# Altium PCB LED_PCB.PcbDoc (part 4 of 4)
Units mil, origin at the board's own origin, x right, y up, seen from the top; angles counter-clockwise.
Board outline 8000 x 4000 mil, 2 copper layers (Top Layer, Bottom Layer); 187 components, 303 nets, 1415 pads, 387 vias.
Unrouted connection lines stored in the file: 1.
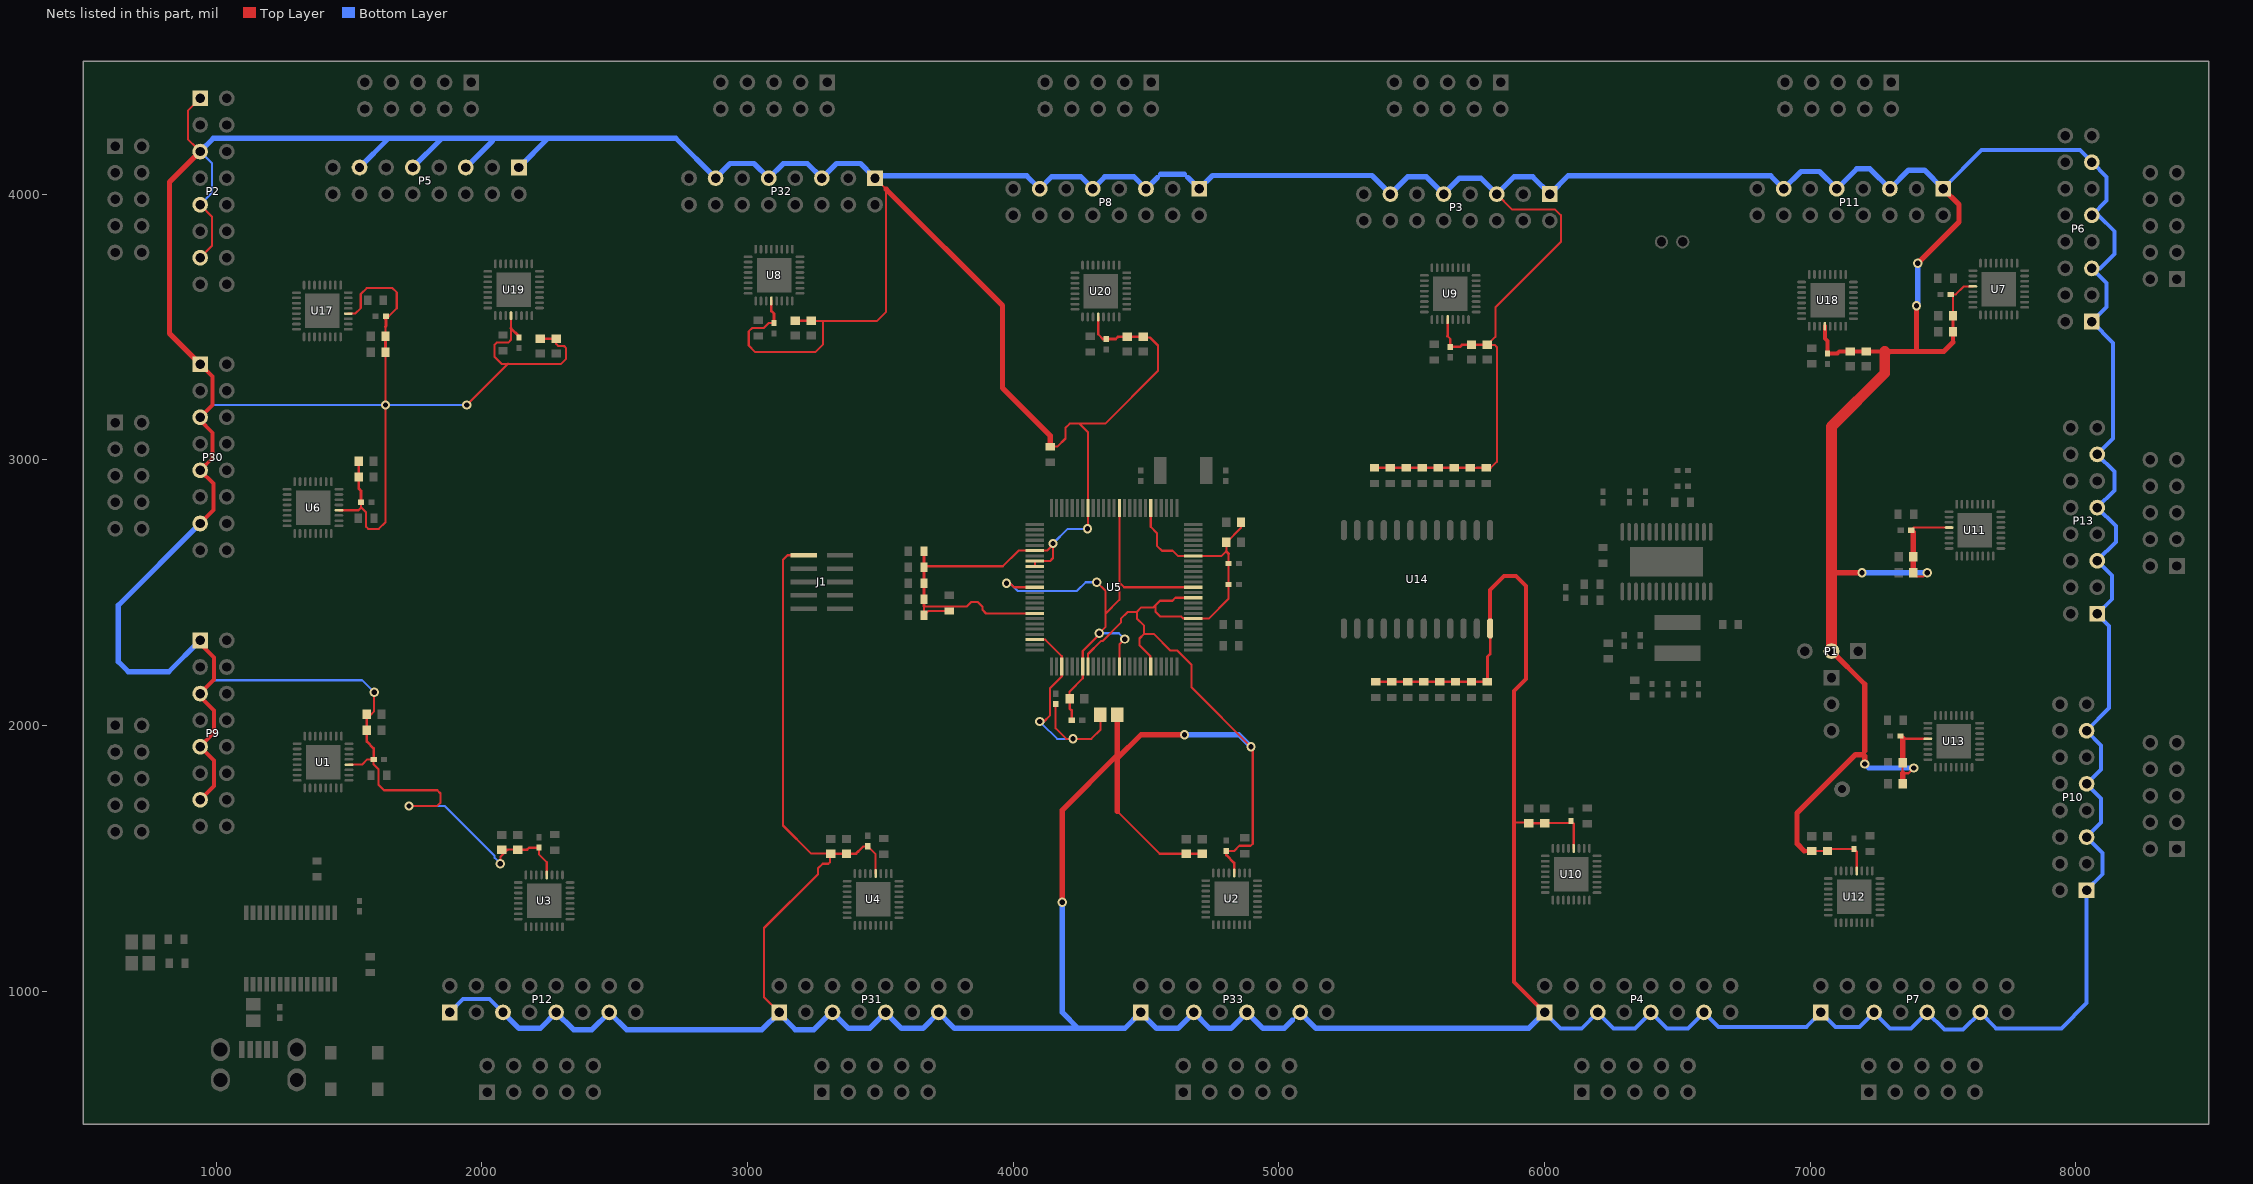
[diagram p4: the nets of this part, all layers, seen from the top]

## Via types
v1: diameter 35, hole 20, Top Layer to Bottom Layer, 371 vias
v2: diameter 25.98, hole 12.99, Top Layer to Bottom Layer, tented top, 12 vias
v3: diameter 89, hole 89, Top Layer to Bottom Layer, 4 vias

## Nets (pads, with @x,y where several pads share a name; then routed paths per layer and width w, separated by ;. In a path a pad name is that pad's centre, name@x,y a point inside that pad or via, vN(x,y) a via of type N, cw(c..) or ccw(c..) an arc to the next point about the centre after c; other vN are vias at no path point) (continued)
VCC: C1.2 C2.2 C3.2 C4.2 C5.2 C6.2 C7.2 C8.2 C9.2 C10.2 C11.2 C12.2 C13.2 C14.2 C15.2 C16.2 C22.2 C23.2 C24.2 C25.2 C26.2 C27.2 C28.2 C29.2 C30.2 C31.2 C32.2 C33.2 C34.2 C35.2 C36.2 C37.2 C38.2 C39.2 C40.2 C41.2 C42.2 C43.2 C44.2 C45.2 C60.2 C61.2 C62.2 C63.2 C64.2 C65.2 C66.2 C67.2 C68.2 C69.2 C70.2 C71.2 J1.1 L1.2 P1.2 P2.1 P2.5 P2.9 P2.13 P3.1 P3.5 P3.9 P3.13 P4.1 P4.5 P4.9 P4.13 P5.1 P5.5 P5.9 P5.13 P6.1 P6.5 P6.9 P6.13 P7.1 P7.5 P7.9 P7.13 P8.1 P8.5 P8.9 P8.13 P9.1 P9.5 P9.9 P9.13 P10.1 P10.5 P10.9 P10.13 P11.1 P11.5 P11.9 P11.13 P12.1 P12.5 P12.9 P12.13 P13.1 P13.5 P13.9 P13.13 P30.1 P30.5 P30.9 P30.13 P31.1 P31.5 P31.9 P31.13 P32.1 P32.5 P32.9 P32.13 P33.1 P33.5 P33.9 P33.13 R5.2 R6.2 R7.2 R8.2 R9.2 R12.2 R21.2 R22.2 R23.2 R24.2 R25.2 R26.2 R27.2 R28.2 R29.2 R30.2 R31.2 R32.2 R33.2 R34.1 R35.2 R36.2 R37.2 U1.28 U2.28 U3.28 U4.28 U5.8 U5.20 U5.32 U5.36 U5.44 U5.56 U5.68 U5.81 U5.83 U5.84 U5.93 U6.28 U7.28 U8.28 U9.28 U10.28 U11.28 U12.28 U13.28 U14.24 U17.28 U18.28 U19.28 U20.28 | length 53581.8
  Top Layer w8: P30.5@940,3160 986,3206 ; P2.13@940,3760 984.27,3804.27 984.27,3915.73 P2.9@940,3960 ; P2.5@940,4160 925,4175 894,4206 894,4314 P2.1@940,4360 ; U6.28@1462.44,2810.16 1536,2810.16 1545.31,2819.47 1545.31,2821 ; U17.28@1497.44,3550.16 1524.16,3550.16 1544.69,3570.69 1544.69,3624 1566.69,3646 1664,3646 1680,3630 1680,3570.37 1649.63,3540 1639.69,3530.06 1637.56,3527.93 1637.56,3501 C61.2@1637.56,3465 ; U1.28@1500.2,1852.4 1549.16,1852.4 1569,1872.24 C4.2@1593.07,1872.24 1593.07,1853 1612,1834.07 1612,1776 1631.86,1756.14 1832.36,1756.14 1844.5,1744 1844.5,1709.64 1832,1697.14 v1(1726,1697.14) ; C25.2@1545.31,2840 1545.31,2821 ; C3.2@1567.64,2042.24 1584,2042.24 1595,2053.24 v1(1595,2125) ; C62.2@1637.56,3405 v1@1637.56,3206.44 ; v1(1638,3206) v1@1637.56,3206.44 ; v1(1943,3206) 2097,3360 ; v1(2070,1480) 2070,1505 2097.44,1532.44 C5.2@2135,1532.44 ; 2098.5,3361.5 2097,3360 ; U19.28@2110.16,3542.56 2110.16,3494.64 2110.16,3451.22 2099.94,3441 2056,3441 2048,3433 2048,3388.25 2076.25,3360 2097,3360 ; C7.2@2215,1540.31 2215,1515 2244.84,1485.16 U3.28@2244.84,1437.44 ; C64.2@2280,3455.12 2280,3436 2288,3428 2309.72,3428 2317.72,3420 2317.72,3380.25 2297.47,3360 2097,3360 ; C28.2@3100,3514.69 3079.69,3514.69 3061,3496 3018,3496 3005,3483 3005,3430 3030,3405 3255,3405 3285,3435 3285,3522.56 ; P31.1@3120,920 3062.47,977.53 3062.47,1237.47 3265.5,1440.5 3265.5,1462.22 3282.78,1479.5 3304.5,1479.5 3310,1485 C11.2@3310,1517.44 ; J1.1@3211.89,2640.79 3150.79,2640.79 3134,2624 3134,1623.44 3240,1517.44 C11.2@3312.76,1517.44 ; C27.2@3240,3522.56 3285,3522.56 ; 3416.63,1525.31 3435,1543.68 3435,1545 C12.2@3452.76,1545 3482.6,1515.16 U4.28@3482.6,1442.44 ; P32.1@3480,4060 3522,4018 3522,3556.56 3488,3522.56 3285,3522.56 ; R8.2@3664.53,2471 R8.2@3664.53,2475 ; R6.2@3664.53,2595 3664.53,2599 3961.33,2599 4020.13,2657.8 U5.81@4081.77,2657.8 4127.2,2657.8 4150,2680.59 v1(4150,2685) 4150,2630 4138.43,2618.43 U5.83@4081.77,2618.43 U5.84@4081.77,2598.74 ; R34.1@3760,2430.47 3680,2430.47 R9.2@3664.53,2415 3664.53,2447.5 3825.78,2447.5 3842.78,2464.5 3867.22,2464.5 3884.5,2447.22 3884.5,2435 3897.93,2421.57 U5.93@4081.77,2421.57 ; R12.2@4130.47,3049.53 4166.53,3049.53 4197,3080 4197,3120 4213,3136 4249.57,3136 ; v1@4275,2740 v1(4280,2740) 4281.57,2741.57 U5.68@4281.57,2818.23 4281.57,3104 4249.57,3136 ; U5.8@4281.57,2221.77 4281.57,2269 4330,2317.43 4336.15,2317.43 4405.5,2386.78 4405.5,2401.53 4431.19,2427.22 4465.5,2427.22 ; U20.28@4320.16,3537.56 4320.16,3472 4337.47,3454.69 4337.69,3454.69 C71.2@4350,3454.69 ; 4391.5,1677 4551.25,1517.24 C9.2@4652.24,1517.24 ; C70.2@4490,3462.56 4492.56,3460 4515,3460 4545,3430 4545,3335 4346,3136 4249.57,3136 ; U5.20@4517.8,2221.77 4516.02,2223.55 4516.02,2261.19 4475.5,2301.71 4475.5,2327.22 4492.78,2344.5 ; U5.56@4517.8,2818.23 4517.8,2747.5 4540.8,2724.5 4540.8,2676.7 4560,2657.5 4600.38,2657.5 4619.77,2638.11 U5.44@4678.23,2638.11 4784.55,2638.11 4802.44,2656 ; U5.36@4678.23,2480.63 4610.63,2480.63 4599.5,2469.5 4552.78,2469.5 4535.5,2452.22 ; C1.2@4802.24,1527.56 4832,1527.56 4851.44,1547 4894,1547 4901.96,1554.96 v1@4901.96,1912.79 ; U2.28@4832.09,1444.68 4832.09,1482.36 ; C15.2@4857.56,2765 4857.56,2744 4803.56,2690 C16.2@4802.44,2690 4802.44,2656 ; v1@4894.72,1920.04 v1@4901.96,1912.79 ; 5635.16,3464.84 5645,3455 C33.2@5645,3424.69 ; R25.2@5720,2969.53 5746,2969.53 ; R28.2@5780,2969.53 5798.03,2969.53 5820.5,2992 5820.5,3424.5 5812.44,3432.56 C31.2@5785,3432.56 5815,3462.56 5815,3573 6061.53,3819.53 6061.53,3920 6040,3941.53 5878.47,3941.53 P3.5@5820,4000 ; 5887,1635 5885,1635 5947.44,1635 C35.2@5950,1632.44 ; C36.2@6000,1632.44 6092.13,1632.44 C37.2@6100,1640.31 6109.84,1630.47 U10.28@6109.84,1537.44 ; C38.2@7005,1527.44 C39.2@7065,1527.44 7072.87,1535.31 C40.2@7165,1535.31 7174.84,1525.47 U12.28@7174.84,1452.44 ; 7080,2580 7085,2575 ; 7103,3399.69 7110.87,3407.56 7103.6,3407.56 ; C43.2@7347.56,1860 7347.56,1820 7370,1820 v1(7390,1840) ; C45.2@7347.56,1952.13 C45.2@7339.69,1960 7349.84,1949.84 U13.28@7442.56,1949.84 ; C41.2@7387.56,2575 7402.56,2560 7425,2560 v1(7440,2575) ; C34.2@7387.56,2727.13 C34.2@7379.69,2735 7389.53,2744.84 U11.28@7522.56,2744.84 ; C22.2@7525,3622.44 C22.2@7529.21,3622.44 ; C29.2@7537.09,3542.44 7537.09,3614.57 C22.2@7529.21,3622.44 ; U7.28@7612.09,3652.28 7577.28,3652.28 7547.44,3622.44 C22.2@7529.21,3622.44 ; 1545.31,2821 1564.25,2802.06 1564.25,2748.24 1572.49,2740 1613,2740 1637.56,2764.56 v1@1637.56,3206.44 ; 4465.5,2427.22 4482.78,2444.5 4527.78,2444.5 4535.5,2452.22 ; 4465.5,2427.22 4465.5,2402.78 4492.78,2375.5 4492.78,2344.5 ; 4492.78,2344.5 4529.28,2344.5 4591.88,2281.9 4617.1,2281.9 4671.65,2227.35 4671.65,2143.1 v1@4901.96,1912.79 ; 4535.5,2452.22 4535.5,2427.78 4552.78,2410.5 4631.98,2410.5 4638.81,2403.67 4676.45,2403.67 U5.32@4678.23,2401.89 4736,2401.89 4810.31,2476.2 C13.2@4810.31,2530 C14.2@4810.31,2610 4810.31,2646 4810.31,2648.13 4802.44,2656
  Top Layer w10: P2.5@925,4175 P2.5@940,4175 ; P9.5@940,2109.06 P9.5@940,2120 ; P9.1@940,2309.06 P9.1@940,2320 ; P30.5@940,3149.06 P30.5@940,3160 ; P2.5@940,4155 P2.5@940,4160 ; C24.2@1537.44,2995 C23.2@1537.44,2935 1537.44,2890.87 1545.31,2883 C25.2@1545.31,2840 ; C3.2@1567.64,2042.24 C2.2@1567.64,1982.24 1567.64,1939.43 1593.07,1914 C4.2@1593.07,1872.24 ; C62.2@1637.56,3405 C61.2@1637.56,3465 ; 1637.56,3501 1639.69,3503.13 1639.69,3530.06 C63.2@1639.69,3540 ; 1637.56,3527.93 C63.2@1639.69,3540 ; C63.2@1649.63,3540 C63.2@1639.69,3540 ; C6.2@2075,1532.44 2097.44,1532.44 ; 2110.16,3494.64 2140,3464.8 C66.2@2140,3459.69 ; C5.2@2135,1532.44 2171,1532.44 2178.87,1540.31 C7.2@2215,1540.31 ; P5.1@2140,4100 P5.1@2140,4120 ; C65.2@2220,3455.12 C64.2@2280,3455.12 ; P32.13@2880,4049.06 P32.13@2880,4060 ; U8.28@3090.16,3597.56 3090.16,3559.84 3100,3550 C28.2@3100,3514.69 ; C26.2@3180,3522.56 C27.2@3240,3522.56 ; C11.2@3312.76,1517.44 C10.2@3372.76,1517.44 3408.76,1517.44 3416.63,1525.31 ; 3664.53,2447.5 R8.2@3664.53,2471 ; R8.2@3664.53,2475 R7.2@3664.53,2535 R6.2@3664.53,2595 ; R6.2@3664.53,2599 R5.2@3664.53,2655 ; 4337.69,3454.69 4338,3455 4350,3455 C71.2@4350,3454.69 4386,3454.69 4393.87,3462.56 C69.2@4430,3462.56 C70.2@4490,3462.56 ; C9.2@4652.24,1517.24 C8.2@4712.24,1517.24 ; C1.2@4802.24,1527.56 4802.24,1512.2 4832.09,1482.36 ; 4802.44,2656 4802.44,2653.87 4810.31,2646 ; R27.2@5360,2969.53 R30.2@5420,2969.53 R35.2@5480,2969.53 R37.2@5540,2969.53 R21.2@5600,2969.53 R23.2@5660,2969.53 R25.2@5720,2969.53 ; R33.2@5365,2164.53 R29.2@5425,2164.53 R26.2@5485,2164.53 R24.2@5545,2164.53 R22.2@5605,2164.53 R36.2@5665,2164.53 R32.2@5725,2164.53 R31.2@5785,2164.53 5785,2259 5795,2269 U14.24@5795,2364.96 ; 5635,3465 5635.16,3464.84 ; 5635.16,3465.16 U9.28@5635.16,3527.56 ; C33.2@5645,3424.69 5681,3424.69 5688.87,3432.56 C32.2@5725,3432.56 C31.2@5785,3432.56 ; 5746,2969.53 R28.2@5780,2969.53 ; C35.2@5940,1632.44 C36.2@6000,1632.44 ; C30.2@7537.09,3482.44 C29.2@7537.09,3542.44 ; P7.13@7640,920 P7.13@7650,920
  Top Layer w15: P9.13@940,1720 992.47,1772.47 992.47,1867.53 P9.9@940,1920 992.47,1972.47 992.47,2056.58 P9.5@940,2109.06 ; P9.5@940,2120 992.47,2172.47 992.47,2256.58 P9.1@940,2309.06 ; P30.5@940,3149.06 987.53,3101.53 987.53,3007.53 P30.9@940,2960 990,2910 990,2810 P30.13@950.94,2770.94 ; P30.1@940,3360 986,3314 986,3206 ; P30.5@950.94,3170.94 984.53,3204.53 ; U14.24@5795,2364.96 5795,2510 5847,2562 5893,2562 5930,2525 5930,2175 5885,2130 5885,1635 5885,1035 P4.1@6000,920 ; 6977.56,1527.44 C38.2@7005,1527.44 ; U18.28@7055.16,3502.56 7055.16,3456 7065,3446.16 C60.2@7065,3399.69 7103,3399.69 ; 7110.87,3407.56 C68.2@7150,3407.56 C67.2@7210,3407.56 7280,3407.56 ; 7537.09,3442.09 C30.2@7537.09,3482.44
  Top Layer w20: P30.13@940,2770.94 P30.13@950.94,2770.94 ; P30.5@940,3170.94 P30.5@950.94,3170.94 ; P30.1@940,3360 825,3475 825,4045 P2.5@940,4160 ; 3522,4018 3960,3580 3960,3270 4140,3090 R12.2@4140,3049.53 ; v1(4185,1335) 4185,1681.5 4391.5,1888 ; 4391.5,1677 4391.5,1875 ; L1.2@4391.5,2040 4391.5,1888 ; v1(4645,1965) 4481.5,1965 4391.5,1875 ; 6977.56,1527.44 6950,1555 6950,1670 7170.3,1890.3 7199.5,1890.3 7205,1884.8 v1(7205,1855) ; P1.2@7080,2280 7205,2155 7205,1905 ; 7085,2575 v1(7195,2575) ; 7282.37,3405 7295.63,3405 ; 7298.19,3407.56 7400,3407.56 ; C44.2@7347.56,1780 7347.56,1820 ; C43.2@7347.56,1860 C45.2@7347.56,1952.13 ; C41.2@7387.56,2575 C42.2@7387.56,2635 C34.2@7387.56,2727.13 ; v1@7400,3570 7400,3407.56 ; v1(7405,3740) 7560,3895 7560,3960 P11.1@7500,4020 ; 7537.09,3442.09 7502.56,3407.56 7400,3407.56 ; 4391.5,1875 4391.5,1888
  Top Layer w40: P1.2@7080,2280 7080,3125 7280,3325 7280,3407.56
  Bottom Layer w8: P9.5@940,2120 990,2170 1550,2170 v1(1595,2125) ; P30.5@940,3160 986,3206 v1(1638,3206) v1(1943,3206) ; P2.9@940,3960 984.53,4004.53 984.53,4115.47 P2.5@940,4160 ; v1(1726,1697.14) 1859.86,1697.14 2048.5,1508.5 2048.5,1501.5 v1(2070,1480) ; 2250,4210 2255,4210 ; P31.1@3120,915 P31.1@3120,920 ; P31.5@3315,920 P31.5@3320,920 ; v1(4150,2685) 4205,2740 v1(4280,2740) ; 4542.53,4062.53 4555,4075 ; 4645,4075 4657.47,4062.53 ; 5050,890 P33.13@5080,920 ; v1(7205,1855) 7220,1840 ; v1(7400,3580) v1@7405,3585 ; P6.5@8060,3720 8090,3720 ; P6.9@8060,3920 P6.9@8085,3920
  Bottom Layer w15: P12.1@1880,920 1930,970 2030,970 P12.5@2080,920 ; P4.1@6000,920 6060,860 6140,860 P4.5@6200,920 6260,860 6340,860 P4.9@6400,920 6460,860 6540,860 P4.13@6600,920 6655,865 6985,865 P7.1@7040,920 7095,865 7185,865 P7.5@7240,920 7300,860 7380,860 P7.9@7440,920 7505,855 7575,855 P7.13@7640,920 7700,860 7945,860 8040,955 P10.1@8040,1380 8100,1440 8100,1520 P10.5@8040,1580 8095,1635 8095,1725 P10.9@8040,1780 8095,1835 8095,1925 P10.13@8040,1980 8125,2065 8125,2375 P13.1@8080,2420 8135,2475 8135,2565 P13.5@8080,2620 8150,2690 8150,2750 P13.9@8080,2820 8145,2885 8145,2955 P13.13@8080,3020 8140,3080 8140,3440 P6.1@8060,3520 8115,3575 8115,3665 P6.5@8060,3720 ; P11.1@7500,4020 7645,4165 8015,4165 P6.13@8060,4120 8115,4065 8115,3975 P6.9@8060,3920 ; P6.9@8085,3920 8145,3860 8145,3775 8090,3720
  Bottom Layer w20: P9.1@940,2320 822,2202 670,2202 632,2240 632,2452 P30.13@940,2760 ; P2.5@940,4160 990,4210 1650,4210 ; P5.13@1540,4100 1650,4210 ; P5.9@1740,4100 1850,4210 ; P5.5@1940,4100 2040,4200 ; P12.5@2080,920 2140,860 2220,860 P12.9@2280,920 2345,855 2415,855 P12.13@2480,920 2545,855 3055,855 P31.1@3120,920 ; P5.1@2140,4100 2250,4210 ; P31.1@3120,915 3180,855 3250,855 P31.5@3315,920 ; P31.5@3320,920 3380,860 3460,860 P31.9@3520,920 3580,860 3660,860 P31.13@3720,920 3780,860 4420,860 P33.1@4480,920 4540,860 4620,860 P33.5@4680,920 4740,860 4820,860 P33.9@4880,920 4940,860 5020,860 5050,890 ; v1(4185,1335) 4185,920 4245,860 ; 4542.53,4062.53 P8.5@4500,4020 4455,4065 4345,4065 P8.9@4300,4020 4255,4065 4145,4065 P8.13@4100,4020 4051,4069 3471,4069 3425,4115 3335,4115 P32.5@3280,4060 3225,4115 3135,4115 P32.9@3080,4060 3025,4115 2935,4115 P32.13@2880,4060 2730,4210 1850,4210 ; 4555,4075 4645,4075 ; v1(4645,1965) 4850,1965 v1(4895,1920) ; 4657.47,4062.53 P8.1@4700,4020 4750,4070 5350,4070 P3.13@5420,4000 5484.53,4064.53 5555.47,4064.53 P3.9@5620,4000 5680,4060 5760,4060 P3.5@5820,4000 5885,4065 5955,4065 P3.1@6020,4000 6089,4069 6851,4069 P11.13@6900,4020 6965,4085 7035,4085 P11.9@7100,4020 7175,4095 7225,4095 P11.5@7300,4020 7370,4090 7430,4090 P11.1@7500,4020 ; P33.13@5080,920 5140,860 5940,860 P4.1@6000,920 ; v1(7195,2575) v1(7440,2575) ; 7220,1840 v1(7390,1840) ; v1@7405,3585 v1(7405,3740) ; 1650,4210 1850,4210
VDD25: C20.2 C21.2 U5.7 U5.14 U5.38 U5.62 U5.88 | length 1999.7
  Top Layer w8: v1(3975,2535) 3988.19,2535 4003.19,2520 U5.88@4081.77,2520 ; C20.2@4212.44,2100 4212.44,2128 4261.89,2177.45 U5.7@4261.89,2221.77 4261.89,2280.26 v1@4328.63,2347 ; v1(4315,2539) 4348,2506 4348,2421.45 ; v1(4324,2347) 4348,2371 4348,2421.45 ; U5.14@4399.69,2221.77 4399.69,2304.69 v1(4420,2325) ; U5.62@4399.69,2818.23 4399.69,2538.31 ; U5.38@4678.23,2520 4418,2520 4399.69,2538.31 ; 4348,2421.45 4399.69,2473.14 4399.69,2538.31
  Top Layer w10: C20.2@4212.44,2100 4212.44,2063.87 4220.31,2056 C21.2@4220.31,2020
  Bottom Layer w8: v1(3975,2535) 3988.19,2535 4017.28,2505.91 4240,2505.91 4273.09,2539 v1(4315,2539) ; v1(4324,2347) 4398,2347 v1(4420,2325) v1@4424.19,2320.81
VDDA: C19.2 L1.1 U5.3 U5.98 | length 932.1
  Top Layer w8: U5.98@4081.77,2323.15 4121,2323.15 4183.15,2261 U5.3@4183.15,2221.77 4183.15,2184 4138,2138.85 4138,2037 4116,2015 v1(4100,2015) ; C19.2@4160,2080.31 4160,1988.84 4199.34,1949.5 v1(4225.5,1949.5) 4294.01,1949.5 4328.5,1984 L1.1@4328.5,2040
  Bottom Layer w8: v1(4100,2015) 4116,2015 4108,2007 4165.5,1949.5 v1(4225.5,1949.5)
pads on no net: D3.2 J1.7 P1.1 P34.2 P34.3 R17.2 R18.2 R19.2 R20.2 SW1.2 SW1.3 U1.2 U1.3 U1.4 U1.21 U1.22 U1.24 U1.25 U2.2 U2.3 U2.4 U2.21 U2.22 U2.24 U2.25 U3.2 U3.3 U3.4 U3.21 U3.22 U3.24 U3.25 U4.2 U4.3 U4.4 U4.21 U4.22 U4.24 U4.25 U5.1 U5.2 U5.5 U5.11 U5.13 U5.16 U5.17 U5.18 U5.35 U5.37 U5.40 U5.43 U5.46 U5.51 U5.52 U5.53 U5.55 U5.67 U5.71 U5.91 U6.2 U6.3 U6.4 U6.21 U6.22 U6.24 U6.25 U7.2 U7.3 U7.4 U7.9 U7.11 U7.12 U7.13 U7.14 U7.21 U7.22 U7.24 U7.25 U8.2 U8.3 U8.4 U8.21 U8.22 U8.24 U8.25 U9.2 U9.3 U9.4 U9.21 U9.22 U9.24 U9.25 U10.2 U10.3 U10.4 U10.21 U10.22 U10.23 U10.24 U10.25 U10.27 U11.2 U11.3 U11.4 U11.9 U11.11 U11.12 U11.13 U11.14 U11.21 U11.22 U11.23 U11.24 U11.25 U11.27 U12.2 U12.3 U12.4 U12.21 U12.22 U12.23 U12.24 U12.25 U12.27 U13.2 U13.3 U13.4 U13.21 U13.22 U13.23 U13.24 U13.25 U13.27 U15.1 U15.2 U15.3 U15.6 U15.8 U15.9 U15.10 U15.12 U15.13 U15.14 U15.24 U15.27 U15.28 U16.27 U17.2 U17.3 U17.4 U17.21 U17.22 U17.24 U17.25 U18.2 U18.3 U18.4 U18.21 U18.22 U18.24 U18.25 U19.2 U19.3 U19.4 U19.21 U19.22 U19.24 U19.25 U20.2 U20.3 U20.4 U20.21 U20.22 U20.24 U20.25
copper on no net: | length 613
  Top Layer w8: 6129.53,1537.44 6129.53,1574.53 6155,1600 6155,1604.69 ; 7349.53,2020 7354.31,2020 7359.31,2015 ; 7375.31,2015 7380,2010.31 7380,2010 7420.47,1969.53 7442.56,1969.53 ; 7415.31,2790 7440.78,2764.53 7522.56,2764.53 ; 7810,3675 7845,3675 ; 7815,3655 7850,3655 ; 7819,3634 7838.37,3634 ; 7820,3615 7843,3615
  Top Layer w10: 6155,1604.69 6160,1609.69 6160,1620 ; 7195,1460 7195,1490 7215,1510 7215,1520 ; 7354.53,2015 7375.31,2015 ; 7394.53,2790 7415.31,2790 ; 7730,2665 7746.17,2665 ; 7730,2705 7746.17,2705 ; 7730,2725 7746.17,2725 ; 7730,2745 7746.17,2745 ; 7730,2765 7745,2765
  other v1: 7117.76,1307.76 7165,1307.76 7212.24,1307.76 7117.76,1355 7165,1355 7212.24,1355 6052.76,1392.76 6100,1392.76 6147.24,1392.76 7117.76,1402.24 7165,1402.24 7212.24,1402.24 6052.76,1440 6100,1440 6147.24,1440 6052.76,1487.24 6100,1487.24 6147.24,1487.24 7492.76,1892.76 7540,1892.76 7587.24,1892.76 7492.76,1940 7540,1940 7587.24,1940 7492.76,1987.24 7540,1987.24 7587.24,1987.24 7572.76,2687.76 7620,2687.76 7667.24,2687.76 7572.76,2735 7620,2735 7667.24,2735 7572.76,2782.24 7620,2782.24 7667.24,2782.24
  other v3: 650,650 8350,650 650,4350 8350,4350

## Other copper
Multi-Layer:
  the board outline again, w10

## Text inside footprints (layer, text, board x,y; h text height)
P2: Top Overlay "2" at 1020,4460 h50 r270; Top Overlay "1" at 920,4460 h50 r270; Top Overlay "15" at 920,3600 h50 r270; Top Overlay "16" at 1020,3600 h50 r270
P3: Top Overlay "2" at 6120,3920 h50 r180; Top Overlay "1" at 6120,4020 h50 r180; Top Overlay "15" at 5260,4020 h50 r180; Top Overlay "16" at 5260,3920 h50 r180
P4: Top Overlay "2" at 5900,1000 h50; Top Overlay "1" at 5900,900 h50; Top Overlay "15" at 6760,900 h50; Top Overlay "16" at 6760,1000 h50
P5: Top Overlay "2" at 2240,4020 h50 r180; Top Overlay "1" at 2240,4120 h50 r180; Top Overlay "15" at 1380,4120 h50 r180; Top Overlay "16" at 1380,4020 h50 r180
P6: Top Overlay "2" at 7980,3420 h50 r90; Top Overlay "1" at 8080,3420 h50 r90; Top Overlay "15" at 8080,4280 h50 r90; Top Overlay "16" at 7980,4280 h50 r90
P7: Top Overlay "2" at 6940,1000 h50; Top Overlay "1" at 6940,900 h50; Top Overlay "15" at 7800,900 h50; Top Overlay "16" at 7800,1000 h50
P8: Top Overlay "2" at 4800,3940 h50 r180; Top Overlay "1" at 4800,4040 h50 r180; Top Overlay "15" at 3940,4040 h50 r180; Top Overlay "16" at 3940,3940 h50 r180
P9: Top Overlay "2" at 1020,2420 h50 r270; Top Overlay "1" at 920,2420 h50 r270; Top Overlay "15" at 920,1560 h50 r270; Top Overlay "16" at 1020,1560 h50 r270
P10: Top Overlay "2" at 7960,1280 h50 r90; Top Overlay "1" at 8060,1280 h50 r90; Top Overlay "15" at 8060,2140 h50 r90; Top Overlay "16" at 7960,2140 h50 r90
P11: Top Overlay "2" at 7600,3940 h50 r180; Top Overlay "1" at 7600,4040 h50 r180; Top Overlay "15" at 6740,4040 h50 r180; Top Overlay "16" at 6740,3940 h50 r180
P12: Top Overlay "2" at 1780,1000 h50; Top Overlay "1" at 1780,900 h50; Top Overlay "15" at 2640,900 h50; Top Overlay "16" at 2640,1000 h50
P13: Top Overlay "2" at 8000,2320 h50 r90; Top Overlay "1" at 8100,2320 h50 r90; Top Overlay "15" at 8100,3180 h50 r90; Top Overlay "16" at 8000,3180 h50 r90
P14: Top Overlay "6" at 700,3240 h50 r270; Top Overlay "10" at 700,2680 h50 r270; Top Overlay "5" at 600,2680 h50 r270; Top Overlay "1" at 600,3240 h50 r270
P15: Top Overlay "6" at 4540,700 h50; Top Overlay "10" at 5100,700 h50; Top Overlay "5" at 5100,600 h50; Top Overlay "1" at 4540,600 h50
P16: Top Overlay "6" at 3400,4340 h50 r180; Top Overlay "10" at 2840,4340 h50 r180; Top Overlay "5" at 2840,4440 h50 r180; Top Overlay "1" at 3400,4440 h50 r180
P17: Top Overlay "6" at 6040,700 h50; Top Overlay "10" at 6600,700 h50; Top Overlay "5" at 6600,600 h50; Top Overlay "1" at 6040,600 h50
P18: Top Overlay "6" at 5935,4340 h50 r180; Top Overlay "10" at 5375,4340 h50 r180; Top Overlay "5" at 5375,4440 h50 r180; Top Overlay "1" at 5935,4440 h50 r180
P19: Top Overlay "6" at 7120,700 h50; Top Overlay "10" at 7680,700 h50; Top Overlay "5" at 7680,600 h50; Top Overlay "1" at 7120,600 h50
P20: Top Overlay "6" at 700,4280 h50 r270; Top Overlay "10" at 700,3720 h50 r270; Top Overlay "5" at 600,3720 h50 r270; Top Overlay "1" at 600,4280 h50 r270
P21: Top Overlay "6" at 8300,3580 h50 r90; Top Overlay "10" at 8300,4140 h50 r90; Top Overlay "5" at 8400,4140 h50 r90; Top Overlay "1" at 8400,3580 h50 r90
P22: Top Overlay "6" at 8300,1435 h50 r90; Top Overlay "10" at 8300,1995 h50 r90; Top Overlay "5" at 8400,1995 h50 r90; Top Overlay "1" at 8400,1435 h50 r90
P23: Top Overlay "6" at 700,2100 h50 r270; Top Overlay "10" at 700,1540 h50 r270; Top Overlay "5" at 600,1540 h50 r270; Top Overlay "1" at 600,2100 h50 r270
P24: Top Overlay "6" at 2060,4340 h50 r180; Top Overlay "10" at 1500,4340 h50 r180; Top Overlay "5" at 1500,4440 h50 r180; Top Overlay "1" at 2060,4440 h50 r180
P25: Top Overlay "6" at 1920,700 h50; Top Overlay "10" at 2480,700 h50; Top Overlay "5" at 2480,600 h50; Top Overlay "1" at 1920,600 h50
P26: Top Overlay "6" at 8300,2500 h50 r90; Top Overlay "10" at 8305,3045 h50 r90; Top Overlay "5" at 8400,3060 h50 r90; Top Overlay "1" at 8400,2500 h50 r90
P27: Top Overlay "6" at 4620,4340 h50 r180; Top Overlay "10" at 4060,4340 h50 r180; Top Overlay "5" at 4060,4440 h50 r180; Top Overlay "1" at 4620,4440 h50 r180
P28: Top Overlay "6" at 3180,700 h50; Top Overlay "10" at 3740,700 h50; Top Overlay "5" at 3740,600 h50; Top Overlay "1" at 3180,600 h50
P29: Top Overlay "6" at 7405,4340 h50 r180; Top Overlay "10" at 6845,4340 h50 r180; Top Overlay "5" at 6845,4440 h50 r180; Top Overlay "1" at 7405,4440 h50 r180
P30: Top Overlay "2" at 1020,3460 h50 r270; Top Overlay "1" at 920,3460 h50 r270; Top Overlay "15" at 920,2600 h50 r270; Top Overlay "16" at 1020,2600 h50 r270
P31: Top Overlay "2" at 3020,1000 h50; Top Overlay "1" at 3020,900 h50; Top Overlay "15" at 3880,900 h50; Top Overlay "16" at 3880,1000 h50
P32: Top Overlay "2" at 3580,3980 h50 r180; Top Overlay "1" at 3580,4080 h50 r180; Top Overlay "15" at 2720,4080 h50 r180; Top Overlay "16" at 2720,3980 h50 r180
P33: Top Overlay "2" at 4380,1000 h50; Top Overlay "1" at 4380,900 h50; Top Overlay "16" at 5240,1000 h50